# Altium PCB Cap_Sensor_8x8.PcbDoc
Units mil, origin at the board's own origin, x right, y up, seen from the top; angles counter-clockwise.
Board outline 3175 x 3000 mil, 2 copper layers (Top Layer, Bottom Layer); 74 components, 83 nets, 388 pads, 67 vias.
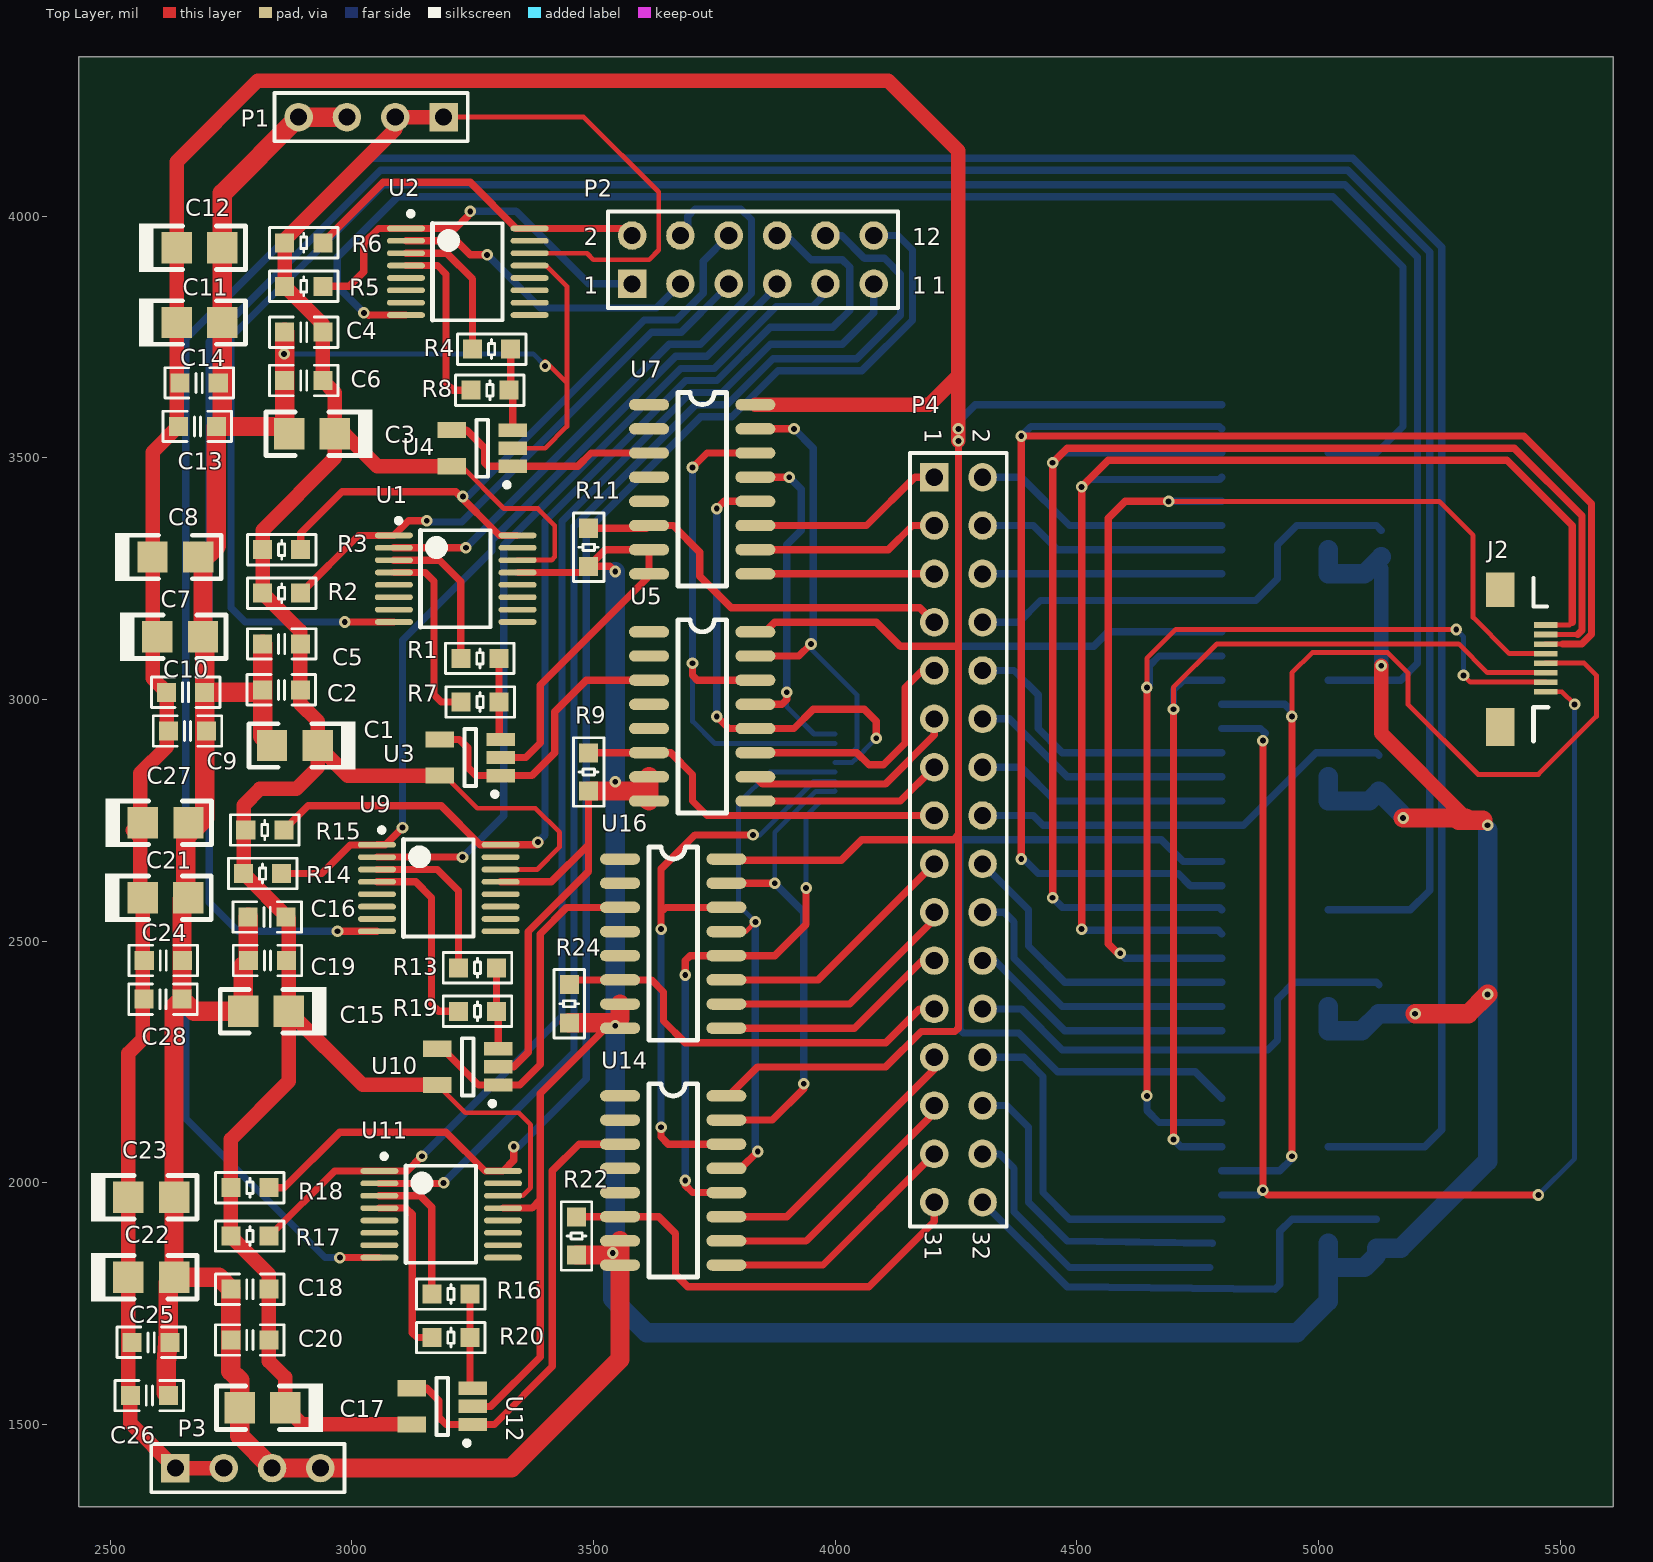
[diagram p0: Top Layer view]
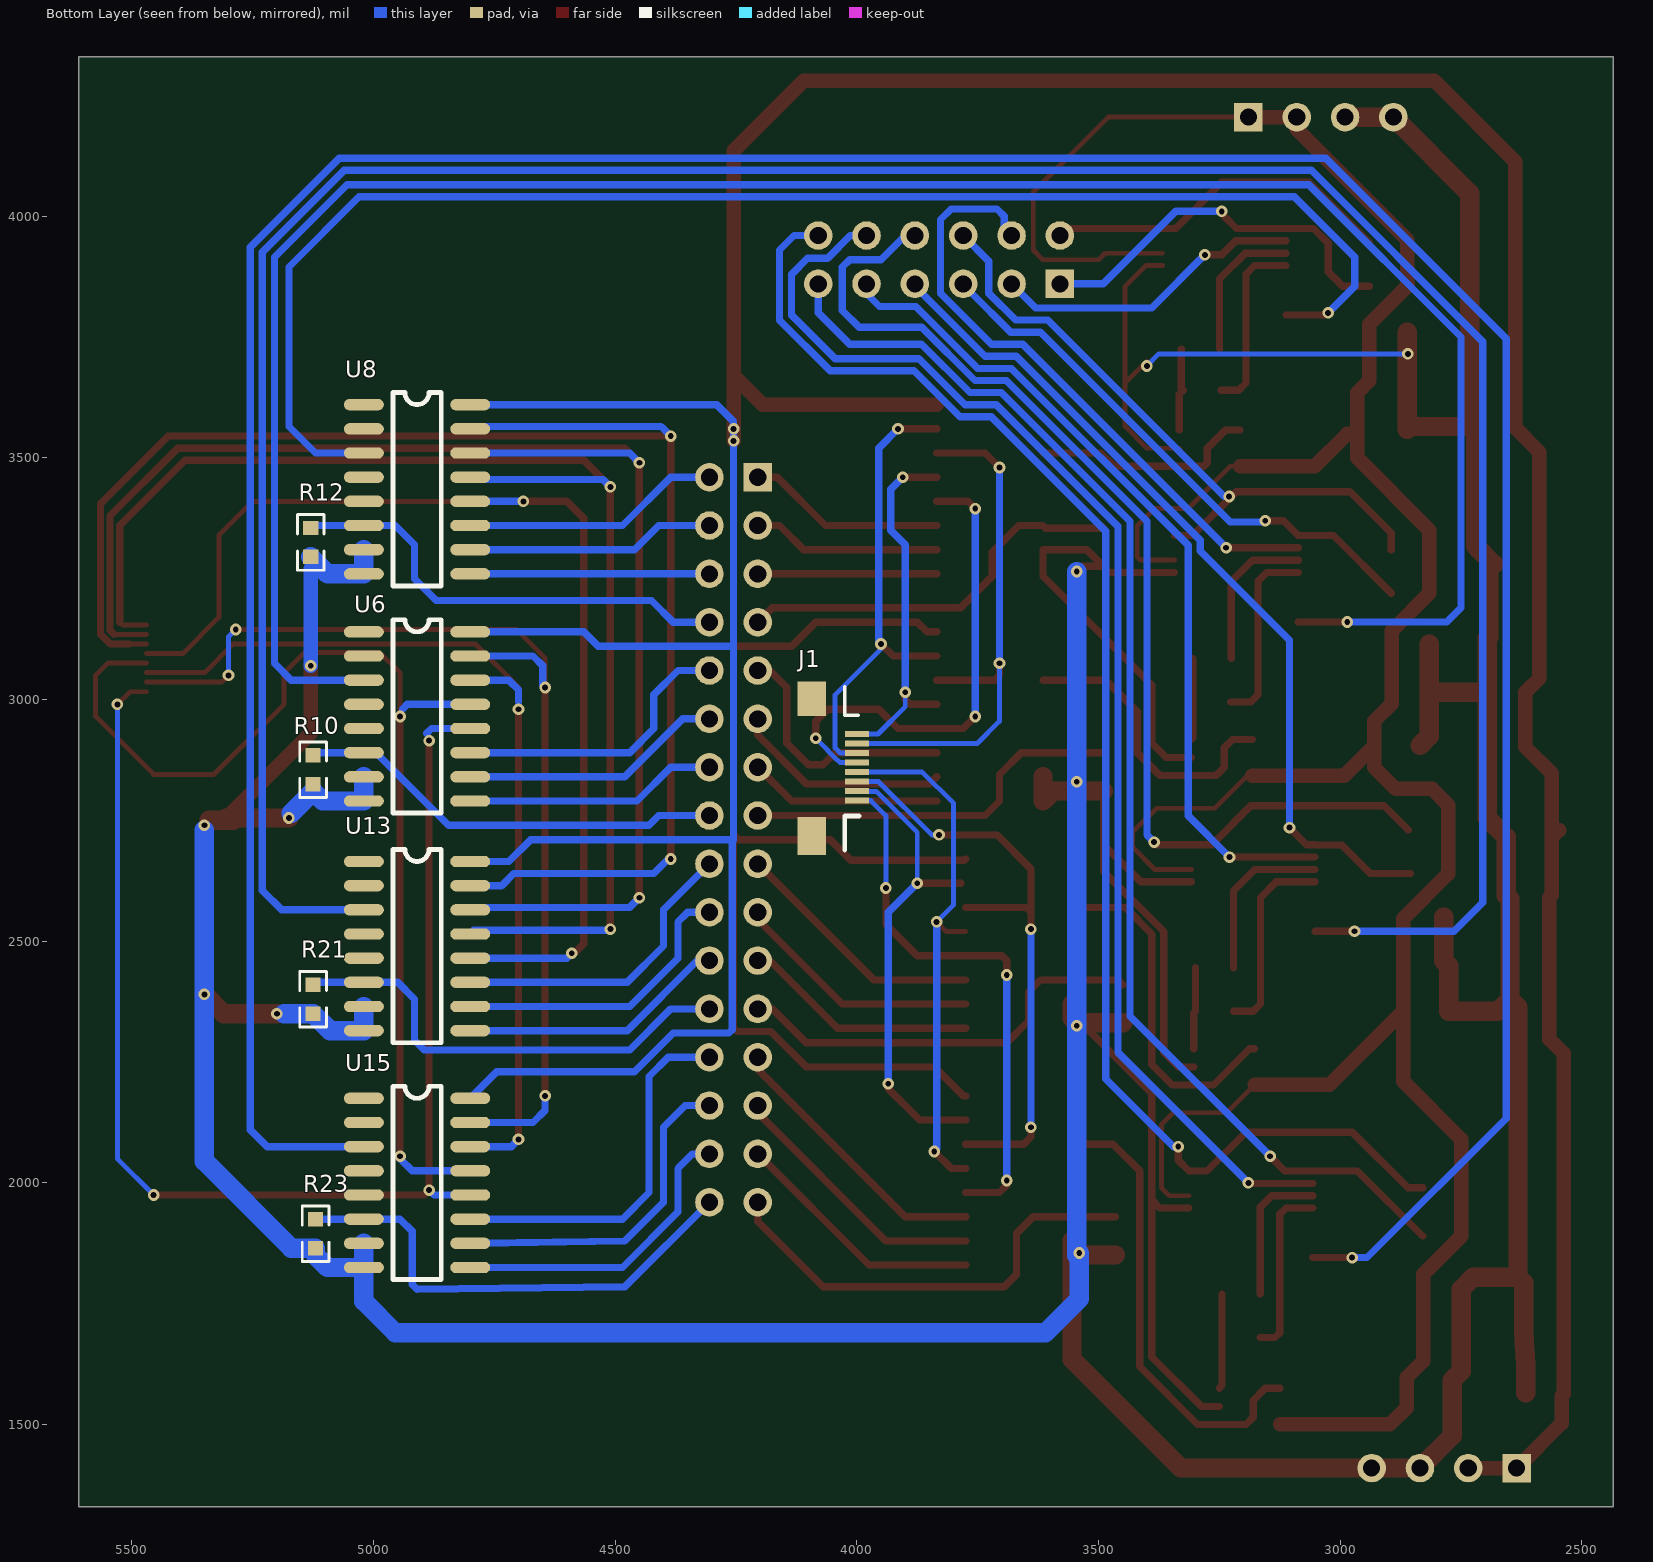
[diagram p1: Bottom Layer view, seen from below]
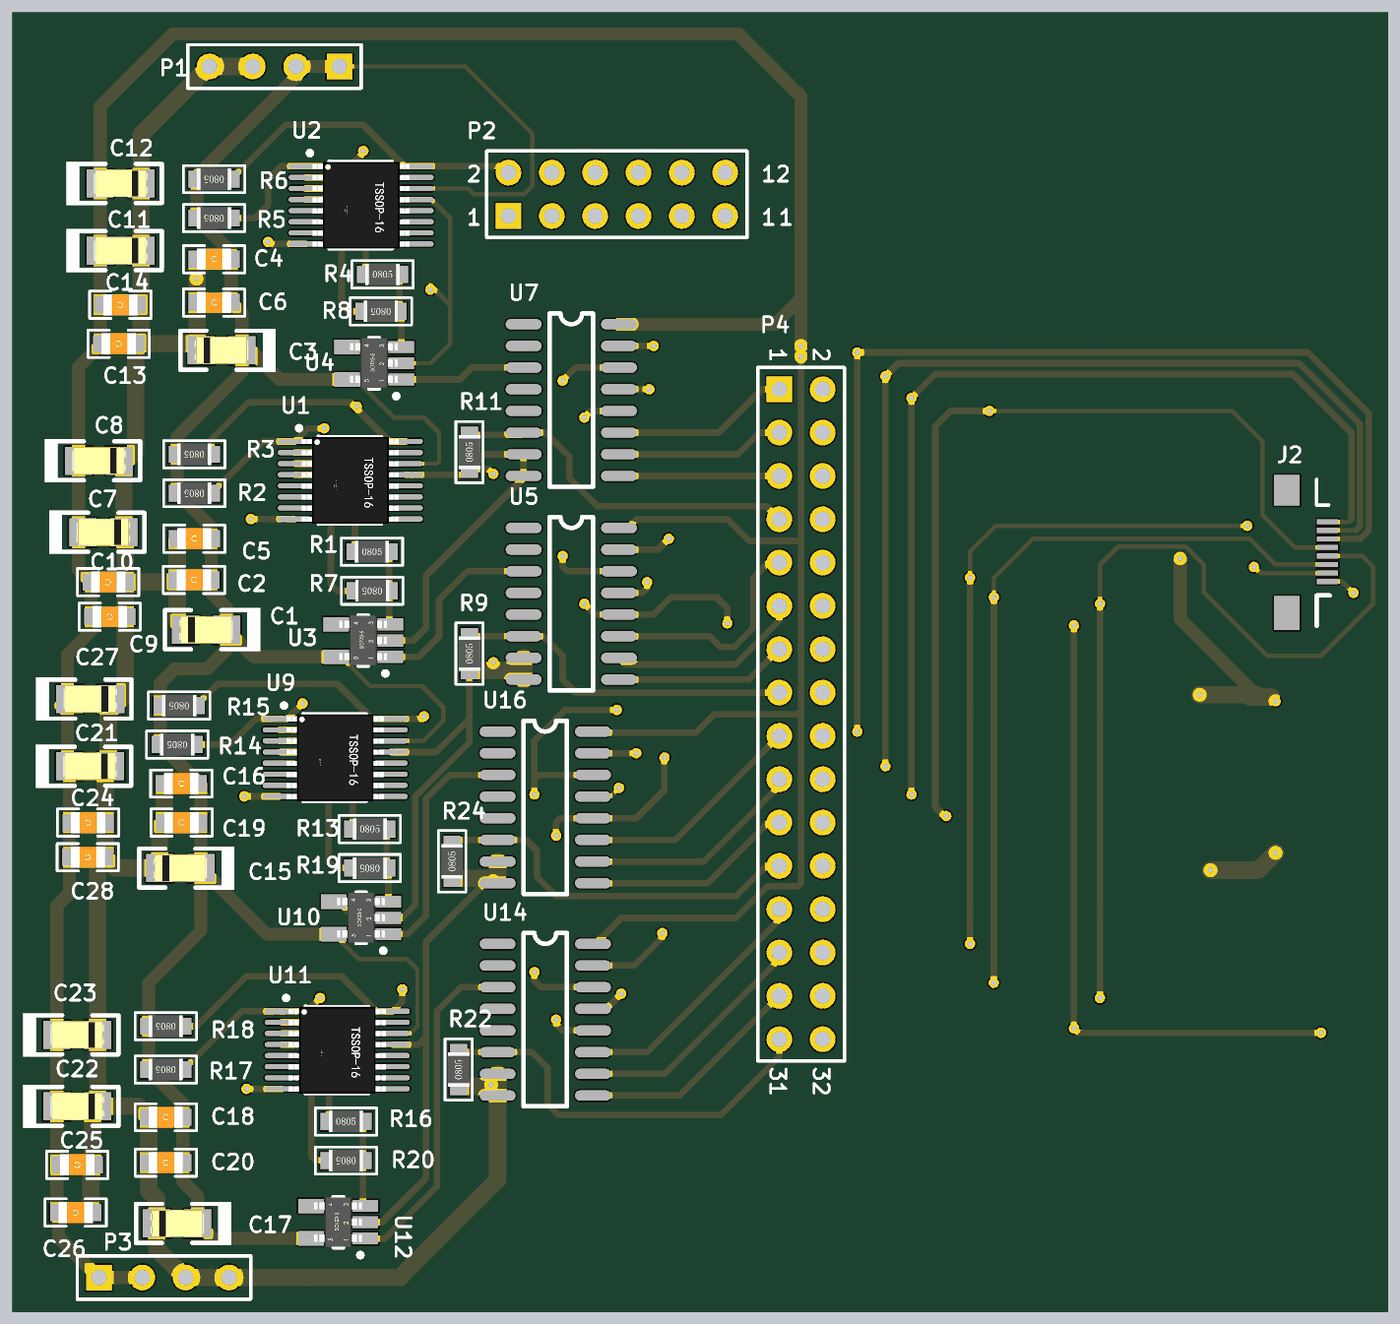
[diagram p2: 3D render of the assembled board from above, using the file's embedded part models]

## Layer stack, top to bottom
Top Solder: solder mask 0.4, Solder Resist, Dk 3.5
Top Layer: signal copper 1.4
Dielectric 1: dielectric 12.6, FR-4, Dk 4.8
Bottom Layer: signal copper 1.4
Bottom Solder: solder mask 0.4, Solder Resist, Dk 3.5

## Board outline
2435,1330 2435,4330 5610,4330 5610,1330

## Design rules (kind name [scope] priority, off if disabled: settings)
Clearance [All] p1: gap=10 ignorepadtopadclearanceinfootprint=TRUE except(0: Arc-Hole Track-Hole SMDPad-Hole THPad-Hole Via-Hole Fill-Hole Poly-Hole Region-Hole Text-Hole; 5: Arc-Arc Arc-Track Arc-SMDPad Track-Track Track-SMDPad SMDPad-SMDPad)
PolygonConnect [All] p1: connectstyle=Relief reliefconductorwidth=10 reliefentries=4 polygonreliefangle="90 Angle" airgapwidth=10
RoutingVias [All] p1: holewidth=28 width=50 viastyle="Through Hole" minholewidth=28 minwidth=50 maxholewidth=28 maxwidth=50
SolderMaskExpansion [All] p1: expansion=4
Width [All] p1: maxlimit=50 minlimit=10 preferedwidth=15
30 further rules are at their usual default settings.

## Components (designator, comment, footprint, x,y, rotation, side; value= is the part's Value field where it differs from the comment)
C1 "Cap Pol2" Cap-TA 2882.24,2905 r0 top value=10uF
C2 "Cap" 0805C 2854.37,3020 r0 top value=100nF
C3 "Cap Pol2" Cap-TA 2917.76,3550 r0 top value=10uF
C4 "Cap" 0805C 2900.63,3760 r0 top value=100nF
C5 "Cap" 0805C 2855,3115 r0 top value=100nF
C6 "Cap" 0805C 2900.63,3660 r0 top value=100nF
C7 "Cap Pol2" Cap-TA 2645,3130 r180 top value=10uF
C8 "Cap Pol2" Cap-TA 2635,3295 r180 top value=10uF
C9 "Cap" 0805C 2660,2935 r180 top value=100nF
C10 "Cap" 0805C 2656.18,3015 r180 top value=100nF
C11 "Cap Pol2" Cap-TA 2685,3780 r180 top value=10uF
C12 "Cap Pol2" Cap-TA 2685,3935 r180 top value=10uF
C13 "Cap" 0805C 2680.55,3565 r180 top value=100nF
C14 "Cap" 0805C 2684.37,3655 r180 top value=100nF
C15 "Cap Pol2" Cap-TA 2822.76,2355 r0 top value=10uF
C16 "Cap" 0805C 2825,2550 r0 top value=100nF
C17 "Cap Pol2" Cap-TA 2815.34,1535 r0 top value=10uF
C18 "Cap" 0805C 2789.16,1780 r0 top value=100nF
C19 "Cap" 0805C 2825.63,2460 r0 top value=100nF
C20 "Cap" 0805C 2789.16,1675 r0 top value=100nF
C21 "Cap Pol2" Cap-TA 2614.37,2590 r180 top value=10uF
C22 "Cap Pol2" Cap-TA 2585.01,1805 r180 top value=10uF
C23 "Cap Pol2" Cap-TA 2585.01,1970 r180 top value=10uF
C24 "Cap" 0805C 2610,2460 r180 top value=100nF
C25 "Cap" 0805C 2585,1670 r180 top value=100nF
C26 "Cap" 0805C 2581.19,1560 r180 top value=100nF
C27 "Cap Pol2" Cap-TA 2615,2745 r180 top value=10uF
C28 "Cap" 0805C 2609.37,2380 r180 top value=100nF
J1 "FPC_8P" FPC8-0.5 4000,2928.74 r270 bottom
J2 "FPC_8P" FPC8-0.5 5470,3154.06 r270 top
P1 "Header 4" HDR1X4 3190,4205 r180 top
P2 "Header 6X2" HDR2X6 3580,3860 r0 top
P3 "Header 4" HDR1X4 2635,1410 r0 top
P4 "Header 16X2" HDR2X16 4205,3460 r270 top
R1 "Res" 0805R 3265,3085 r0 top value=100k
R2 "Res" 0805R 2855,3220 r180 top value=3k3
R3 "Res" 0805R 2855,3310 r180 top value=3k3
R4 "Res" 0805R 3289.37,3725 r0 top value=100k
R5 "Res" 0805R 2900.63,3855 r180 top value=3k3
R6 "Res" 0805R 2900.63,3945 r180 top value=3k3
R7 "Res" 0805R 3265.63,2995 r180 top value=118k
R8 "Res" 0805R 3285.63,3640 r180 top value=118k
R9 "Res" 0805R 3490,2850 r90 top value=0R
R10 "Res" 0603R 5125,2855 r90 bottom value=0R
R11 "Res" 0805R 3490,3315 r90 top value=0R
R12 "Res" 0603R 5130,3325 r90 bottom value=0R
R13 "Res" 0805R 3260,2445 r0 top value=100k
R14 "Res" 0805R 2815.63,2640 r180 top value=3k3
R15 "Res" 0805R 2820,2730 r180 top value=3k3
R16 "Res" 0805R 3205,1770 r0 top value=100k
R17 "Res" 0805R 2789.16,1890 r180 top value=3k3
R18 "Res" 0805R 2789.16,1990 r180 top value=3k3
R19 "Res" 0805R 3260,2355 r180 top value=118k
R20 "Res" 0805R 3205,1680 r180 top value=118k
R21 "Res" 0603R 5125,2380 r90 bottom value=0R
R22 "Res" 0805R 3465,1890 r90 top value=0R
R23 "Res" 0603R 5120,1895 r90 bottom value=0R
R24 "Res" 0805R 3450,2370.63 r90 top value=0R
U1 "AD7746" TSSOP16 3215,3250 r0 top
U2 "AD7746" TSSOP16 3240,3885 r0 top
U3 "AD8515" sot23-5 3245,2880 r180 top
U4 "AD8515" sot23-5 3270,3520 r180 top
U5 "CD4051" SO16 3775,3165 r0 top
U6 "CD4051" SO16 4860,3165 r180 bottom
U7 "CD4051" SO16 3775,3635 r0 top
U8 "CD4051" SO16 4860,3635 r180 bottom
U9 "AD7746" TSSOP16 3180,2610 r0 top
U10 "AD8515" sot23-5 3240,2240 r180 top
U11 "AD7746" TSSOP16 3185,1935 r0 top
U12 "AD8515" sot23-5 3187.2,1537.6 r180 top
U13 "CD4051" SO16 4860,2690 r180 bottom
U14 "CD4051" SO16 3715,2205 r0 top
U15 "CD4051" SO16 4860,2200 r180 bottom
U16 "CD4051" SO16 3715,2695 r0 top

## Footprints (in the part's own frame and the unit in brackets; to place one, negate y for a bottom-side part, rotate by r counter-clockwise, add the part's x,y. Pads: shape width x height; smd on the part's side, far side on the other; paste and mask are expansions set on the pad)
0603R [mm]
  rect 0.76x0.8 smd: 1(-0.76,0) 2(0.76,0)
  silkscreen extent -1.46,-0.7 1.46,0.7, body extent -1,-0.39 1,0.39, height 0.79
0805C [mm]
  rect 1x1 smd: 1(-1,0) 2(1,0)
  silkscreen extent -1.8,-0.8 1.8,0.8, body extent -1.01,-0.62 1,0.63, height 0.92
0805R [mm]
  rect 1x1 smd: 1(-1,0) 2(1,0)
  silkscreen extent -1.8,-0.8 1.8,0.8, body extent -1,-0.63 1,0.63, height 0.55
Cap-TA [mm]
  rect 1.6x1.65 smd: 1(1.2,0) 2(-1.2,0)
  silkscreen extent -2.41,-1.27 3.17,1.27, body extent -1.6,-0.8 1.6,0.8, height 1.61
FPC8-0.5 [mm]
  rect 0.3x1.25 smd: 1(0,0) 2(0.5,0) 3(1,0) 4(1.5,0) 5(2,0) 6(2.5,0) 7(3,0) 8(3.5,0)
  rect 1.8x1.5 smd: 9(-1.85,-2.375)
  rect 2x1.5 smd: 10(5.35,-2.375)
  silkscreen extent -2.48,-0.64 6.1,0.13
HDR1X4 [mm] "Connector; Header; 4 Position"
  rect 1.5x1.5 hole 0.9: 1(0,0)
  round 1.5 hole 0.9: 2(2.54,0) 3(5.08,0) 4(7.62,0)
  silkscreen extent -1.27,-1.27 8.89,1.27
HDR2X6 [mm] "Connector; Header; 6x2 Position"
  rect 1.5x1.5 hole 0.9: 1(0,0)
  round 1.5 hole 0.9: 2(0,2.54) 3(2.54,0) 4(2.54,2.54) 5(5.08,0) 6(5.08,2.54) 7(7.62,0) 8(7.62,2.54) 9(10.16,0) 10(10.16,2.54) 11(12.7,0) 12(12.7,2.54)
  silkscreen extent -1.27,-1.27 13.97,3.81
HDR2X16 [mm] "Connector; Header; 16x2 Position"
  rect 1.5x1.5 hole 0.9: 1(0,0)
  round 1.5 hole 0.9: 2(0,2.54) 3(2.54,0) 4(2.54,2.54) 5(5.08,0) 6(5.08,2.54) 7(7.62,0) 8(7.62,2.54) 9(10.16,0) 10(10.16,2.54) 11(12.7,0) 12(12.7,2.54) 13(15.24,0) 14(15.24,2.54) 15(17.78,0) 16(17.78,2.54) 17(20.32,0) 18(20.32,2.54) 19(22.86,0) 20(22.86,2.54) 21(25.4,0) 22(25.4,2.54) 23(27.94,0) 24(27.94,2.54) 25(30.48,0) 26(30.48,2.54) 27(33.02,0) 28(33.02,2.54) 29(35.56,0) 30(35.56,2.54) 31(38.1,0) 32(38.1,2.54)
  silkscreen extent -1.27,-1.27 39.37,3.81
SO16 [mm]
  oval 2.1x0.6 smd: 1(-4.064,-0.635) 2(-4.064,-1.905) 3(-4.064,-3.175) 4(-4.064,-4.445) 5(-4.064,-5.715) 6(-4.064,-6.985) 7(-4.064,-8.255) 8(-4.064,-9.525) 9(1.524,-9.525) 10(1.524,-8.255) 11(1.524,-6.985) 12(1.524,-5.715) 13(1.524,-4.445) 14(1.524,-3.175) 15(1.524,-1.905) 16(1.524,-0.635)
  silkscreen extent -2.54,-10.16 0,0
sot23-5 [mm]
  rect 1.5x0.7 smd: 1(-1.595,0.95) 2(-1.595,0) 3(-1.595,-0.95)
  rect 1.5x0.85 smd: 4(1.595,-0.95) 5(1.595,0.95)
  silkscreen extent -1.42,-1.5 0.3,2.05, body extent -1.39,-1.46 1.41,1.44, height 1.09
TSSOP16 [mm]
  oval 2x0.3 smd: 1(-3.25,2.275) 2(-3.25,1.625) 3(-3.25,0.975) 4(-3.25,0.325) 5(-3.25,-0.325) 6(-3.25,-0.975) 7(-3.25,-1.625) 8(-3.25,-2.275) 9(3.25,-2.275) 10(3.25,-1.625) 11(3.25,-0.975) 12(3.25,-0.325) 13(3.25,0.325) 14(3.25,0.975) 15(3.25,1.625) 16(3.25,2.275)
  silkscreen extent -3.12,-2.55 1.83,3.17, body extent -2.85,-2.56 2.85,2.54, height 1.45

## Part data
C1 C3 C7 C8 C11 C12 C15 C17 C21 C22 C23 C27: "Polarized Capacitor (Axial)", LatestRevisionDate=17-Jul-2002, LatestRevisionNote="Re-released for DXP Platform.", PackageDescription="Polarized Capacitor; 2 Leads", PackageReference=POLAR0.8, Published=8-Jun-2000, Publisher="Altium Limited"
C2 C4 C5 C6 C9 C10 C13 C14 C16 C18 C19 C20 C24 C25 C26 C28: "Capacitor", LatestRevisionDate=17-Jul-2002, LatestRevisionNote="Re-released for DXP Platform.", PackageDescription="Radial Cap, Thru-Hole; 2 Leads; 0.3 in Pin Spacing", PackageReference=RAD-0.3, Published=8-Jun-2000, Publisher="Altium Limited"
P1 P3: "Header, 4-Pin", LatestRevisionDate=17-Jul-2002, LatestRevisionNote="Re-released for DXP Platform.", Publisher="Altium Limited"
P2: "Header, 6-Pin, Dual row", LatestRevisionDate=17-Jul-2002, LatestRevisionNote="Re-released for DXP Platform.", Publisher="Altium Limited"
P4: "Header, 16-Pin, Dual row", LatestRevisionDate=17-Jul-2002, LatestRevisionNote="Re-released for DXP Platform.", Publisher="Altium Limited"
R1 R2 R3 R4 R5 R6 R7 R8 R9 R10 R11 R12 R13 R14 R15 R16 R17 R18 R19 R20 R21 R22 R23 R24: "Resistor", LatestRevisionDate=17-Jul-2002, LatestRevisionNote="Re-released for DXP Platform.", PackageDescription="Axial Device, Thru-Hole; 2 Leads; 0.4 in Pin Spacing", PackageReference=AXIAL-0.4, Published=8-Jun-2000, Publisher="Altium Limited"

## Via types
v1: diameter 24, hole 12, Top Layer to Bottom Layer, 67 vias

## Nets (pads, with @x,y where several pads share a name; then routed paths per layer and width w, separated by ;. In a path a pad name is that pad's centre, name@x,y a point inside that pad or via, vN(x,y) a via of type N, cw(c..) or ccw(c..) an arc to the next point about the centre after c; other vN are vias at no path point)
GND: C1.2 C2.1 C3.2 C4.1 C5.1 C6.1 C7.2 C8.2 C9.1 C10.1 C11.2 C12.2 C13.1 C14.1 C15.2 C16.1 C17.2 C18.1 C19.1 C20.1 C21.2 C22.2 C23.2 C24.1 C25.1 C26.1 C27.2 C28.1 P1.3 P1.4 P3.3 P3.4 R9.1 R10.1 R11.1 R12.1 R21.1 R22.1 R23.1 R24.1 U1.13 U2.13 U3.2 U4.2 U5.7 U5.8 U6.7 U6.8 U7.7 U7.8 U8.7 U8.8 U9.13 U10.2 U11.13 U12.2 U13.7 U13.8 U14.7 U14.8 U15.7 U15.8 U16.7 U16.8 | length 15683.3
  Top Layer w10: U4.2 3400,3520 3445,3565 3445,3655 ; U2.13 3402.2,3897.8 3445,3855 3445,3655 ; v1(3400,3690) 3400,3700 3445,3655
  Top Layer w15: U12.2 3287.6,1537.6 3390,1640 3390,1965 ; U10.2 3335,2240 3365,2270 3365,2520 3490,2645 3490,2700 ; U3.2 3360,2880 3390,2910 3390,3030 3615,3255 U7.8 U7.7 3524.37,3310 R11.1 ; U9.13 3412.8,2622.8 3490,2700 ; U11.13 3372.8,1947.8 3390,1965 ; U1.13 3477.17,3262.8 R11.1 ; R9.1 3490,2700 ; U16.8@3536.26,2331.26 3390,2185 3390,1965 ; v1(3545,3265) 3534.37,3275.63 R11.1
  Top Layer w30: v1(5130,3070) 5130,2930 5305,2755 5290,2750
  Top Layer w40: C26.1@2616.12,1565.56 2616.12,1625 2619.22,1670.35 2619.56,1675.33 2620.56,1690 2620.56,1793.31 C22.2 ; C16.1 2785.63,2460.63 C19.1 2775.51,2449.25 C15.2 2673.74,2355 C28.1 ; C2.1 2810,3015 C10.1 ; C5.1 2815.63,2924.37 C1.2 ; C4.1 C6.1 2861.26,3559.25 2855.51,3565 C13.1 ; P1.3 P1.4 2732.24,4047.24 C12.2 C11.2 2732.24,3577.32 C13.1 ; R24.1 U16.8@3536.26,2331.26 ; R22.1 v1@3534.37,1850.63 ; R9.1 3594.37,2810.63 U5.8 U5.7 ; U14.7 U14.8 3555,1635 3330,1410 P3.4 P3.3 2768.09,1476.91 C17.2 2768.09,1591.91 2749.79,1610.21 C20.1 C18.1 2724.79,1805 C22.2 ; 3555,2340 U16.7 ; v1(5175,2755) 5305,2755 ; v1(5200,2350) 5310,2350 v1(5350,2390) ; 5290,2750 5340,2750 ; C22.2 C23.2 2632.25,2363.51 C28.1 ; C28.1 2648.74,2587.13 2656.61,2595 2656.61,2715 2695.55,2753.94 C10.1 ; C10.1 2695.55,3126.69 C7.2 2692.24,3270 2682.24,3280 2719.92,3317.68 C13.1
  Bottom Layer w10: v1(2860,3715) 3375,3715 v1(3400,3690)
  Bottom Layer w30: v1(5130,3070) 5130,3270.08
  Bottom Layer w40: v1(3540,1855) 3540,1760 3610,1690 4955,1690 5020,1755 U15.8 ; v1@3545,1850 v1(3545,2325) v1(3545,2830) v1(3545,3265) ; U15.7 U15.8 ; U13.7 U13.8 5089.92,2315 R21.1 5184.92,2350.08 ; U6.7 U6.8 5105,2790 5125,2810 v1@5170,2765 ; U8.7 U8.8 5094.92,3260 R12.1 ; v1@5350,2730 v1(5350,2390) 5350,2045 5170.08,1865.08 R23.1 5120,1850 5095,1825 U15.8
  other v1: 5350,2740
NetR1_1: R1.1 U1.3 | length 316.2
  Top Layer w15: U1.3 3181.61,3288.39 3225.63,3244.37 R1.1
NetR1_2: R1.2 R7.1 U3.3 | length 169
  Top Layer w15: R1.2 3304.37,2995.63 R7.1 3305,2920.2 U3.3
NetR4_1: R4.1 U2.3 | length 305.1
  Top Layer w15: U2.3 3196.61,3923.39 3250,3870 R4.1
NetR4_2: R4.2 R8.1 U4.3 | length 172.4
  Top Layer w15: R4.2 3328.74,3643.74 R8.1 3332.8,3632.2 U4.3
NetR7_2: R7.2 U1.4 | length 387.8
  Top Layer w15: U1.4 3152.2,3262.8 3170,3245 3170,3010 3185,2995 R7.2
NetR8_2: R8.2 U2.4 | length 372.8
  Top Layer w15: U2.4 3177.2,3897.8 3195,3880 3195,3655 3210,3640 R8.2
NetR13_1: R13.1 U9.3 | length 346.2
  Top Layer w15: U9.3 3176.61,2648.39 3220.63,2604.37 R13.1
NetR13_2: R13.2 R19.1 U10.3 | length 169
  Top Layer w15: R13.2 R19.1 3302.79,2351.58 U10.3
NetR16_1: R16.1 U11.3 | length 297.9
  Top Layer w15: U11.3 3141.61,1973.39 3165.63,1949.37 R16.1
NetR16_2: R16.2 R20.1 U12.3 | length 197.3
  Top Layer w15: R16.2 R20.1 3244.37,1580.63 U12.3
NetR19_2: R19.2 U9.4 | length 408.4
  Top Layer w15: U9.4 3132.2,2622.8 3165,2590 3165,2370 3180,2355 R19.2
NetR20_2: R20.2 U11.4 | length 363
  Top Layer w15: U11.4 3112.2,1947.8 3125,1935 3125,1690 3135,1680 R20.2
RDY1: P2.3 U2.2 | length 646.2
  Top Layer w15: U2.2 3216.02,3948.98 3245,3920 v1(3280,3920)
  Bottom Layer w15: v1(3280,3920) 3390,3810 3630,3810 P2.3
RDY2: P2.4 U1.2 | length 1304.1
  Top Layer w15: U1.2 v1(3236.02,3313.98)
  Bottom Layer w15: v1(3236.02,3313.98) 3657.05,3735 3721.51,3735 3827.03,3840.52 3827.03,3992.97 3805,4015 3710,4015 3695,4000 3695,3975 P2.4
RDY3: P2.9 U9.2 | length 1758.8
  Top Layer w15: U9.2 v1(3228.98,2673.98)
  Bottom Layer w15: v1(3228.98,2673.98) 3314.55,2759.55 3314.55,3319.19 3680.36,3685 3750,3685 3877.97,3812.97 3952.97,3812.97 3980,3840 P2.9
RDY4: P2.10 U11.2 | length 2732.7
  Top Layer w15: U11.2 3188.98,1998.98 v1(3190,2000)
  Bottom Layer w15: v1(3190,2000) 3460,2270 3460,3358.58 3711.42,3610 3776.42,3610 3871.42,3705 4045,3705 4135,3795 4135,3880 4102.03,3912.97 4060.52,3912.97 4013.49,3960 P2.10
SCL1: P2.1 R5.1 U2.1 | length 791.8
  Top Layer w15: R5.1 2995,3855 3025,3885 3025,3944.14 3055.43,3974.57 U2.1 3214.57,3974.57 v1@3240,4000
  Bottom Layer w15: v1(3245,4010) 3340,4010 3490,3860 P2.1
SCL2: P2.5 R2.1 U1.1 | length 1162.7
  Top Layer w15: R2.1 3013.94,3339.57 U1.1 3117.48,3370 v1(3155,3370)
  Bottom Layer w15: v1(3155,3370) 3157.5,3367.5 3227.6,3367.5 3262.5,3402.4 3262.5,3402.5 3620,3760 3681.86,3760 3765,3843.14 3765,3860 P2.5
SCL3: P2.7 R14.1 U9.1 | length 1779.3
  Top Layer w15: R14.1 2937.8,2640 2996.77,2698.98 3051.46,2698.98 U9.1 3069.57,2699.57 v1(3105,2735)
  Bottom Layer w15: v1(3105,2735) 3105,3122.85 3289.55,3307.4 3289.55,3329.55 3670,3710 3735,3710 3870,3845 3870,3860 P2.7
SCL4: P2.11 R17.1 U11.1 | length 2702.4
  Top Layer w15: R17.1 2830,1890 2964.57,2024.57 U11.1 3114.57,2024.57 v1(3145,2055)
  Bottom Layer w15: v1(3145,2055) 3435,2345 3435,3368.93 3701.07,3635 3766.07,3635 3866.07,3735 4015,3735 4080,3800 P2.11
SDA1: P2.2 R6.1 U2.16 | length 737.3
  Top Layer w15: R6.1 3065,4070 3245,4070 3340.43,3974.57 U2.16 3565.43,3974.57 P2.2
SDA2: P2.6 R3.1 U1.16 | length 1368.5
  Top Layer w15: R3.1 2894.37,3344.37 2980,3430 3215,3430 3305.43,3339.57 U1.16
  Bottom Layer w15: v1(3230,3420) 3240,3420 3605,3785 3671.51,3785 3727.03,3840.52 3727.03,3907.03 P2.6
SDA3: P2.8 R15.1 U9.16 | length 2338.1
  Top Layer w15: R15.1 2909.37,2780 3185,2780 3265.43,2699.57 U9.16 3383.7,2699.57 3389.14,2705 v1(3385,2705)
  Bottom Layer w15: v1(3385,2705) 3400,2720 3400,3369.29 3690.71,3660 3755.71,3660 3865.71,3770 3995,3770 4030,3805 4030,3895 4015,3910 3950,3910 3900,3960 P2.8
SDA4: P2.12 R18.1 U11.16 | length 3059.7
  Top Layer w15: R18.1 2860,1990 2975,2105 3195,2105 3275.43,2024.57 U11.16 3335,2046.62 v1(3335,2075)
  Bottom Layer w15: v1(3335,2075) 3345,2075 3485,2215 3485,3348.22 3721.78,3585 3786.78,3585 3881.78,3680 4055.36,3680 4160,3784.64 4160,3930 4130,3960 P2.12
Switch1_Down: U2.8 U8.3 | length 3039.6
  Top Layer w15: v1@3035,3795 3035.43,3795.43 U2.8
  Bottom Layer w15: v1(3025,3800) 2970,3855 2970,3915 3095,4040 5030,4040 5175,3895 5175,3565 5120,3510 U8.3
Switch1_Down_A: P4.2 U8.11 | length 536.4
  Bottom Layer w15: P4.2 4385,3460 4485,3360 U8.11
Switch1_Down_B: P4.4 U8.10 | length 515.7
  Bottom Layer w15: P4.4 4410,3360 4460,3310 U8.10
Switch1_Down_C: P4.6 U8.9 | length 502.1
  Bottom Layer w15: P4.6@4310,3265 P4.6 U8.9
Switch1_Down_INH: P4.8 R12.2 U8.6 | length 953
  Bottom Layer w15: P4.8 4380,3160 4425,3205 4870,3205 4915,3250 4915,3320 4955,3360 U8.6 5119.92,3360 R12.2@5130,3349.92
Switch1_Up: U4.1 U4.4 U7.3 | length 467.7
  Top Layer w15: U4.4 3237.6,3557.4 3275,3520 3275,3490 3282.4,3482.6 U4.1 3467.6,3482.6 3495,3510 U7.3
Switch1_Up_A: P4.1 U7.11 | length 411.4
  Top Layer w15: U7.11 4065,3360 4165,3460 P4.1
Switch1_Up_B: P4.3 U7.10 | length 390.7
  Top Layer w15: U7.10 4110,3310 4160,3360 P4.3
Switch1_Up_C: P4.5 U7.9 | length 370
  Top Layer w15: U7.9 P4.5
Switch1_Up_INH: P4.7 R11.2 U7.6 | length 837.4
  Top Layer w15: R11.2@3495.63,3360 R11.2 3609.37,3354.37 U7.6 3665,3360 3720,3305 3720,3255 3785,3190 4175,3190 P4.7
Switch2_Down: U1.8 U6.3 | length 4596.4
  Top Layer w15: v1(2985.43,3160.43) U1.8
  Bottom Layer w15: v1(2985.43,3160.43) 2779.57,3160.43 2750,3190 2750,3750 3065,4065 5055,4065 5205,3915 5205,3075 5170,3040 U6.3
Switch2_Down_A: P4.10 U6.11 | length 606.4
  Bottom Layer w15: P4.10 4370,3060 4420,3010 4420,2940 4470,2890 U6.11
Switch2_Down_B: P4.12 U6.10 | length 544.7
  Bottom Layer w15: P4.12 4360,2960 4480,2840 U6.10
Switch2_Down_C: P4.14 U6.9 | length 524
  Bottom Layer w15: P4.14 4385,2860 4455,2790 U6.9
Switch2_Down_INH: P4.16 R10.2 U6.6 | length 913.7
  Bottom Layer w15: P4.16@4320,2745 P4.16 4410,2760 4430,2740 4845,2740 4995,2890 U6.6 5119.92,2890 R10.2
Switch2_Up: U3.1 U3.4 U5.3 | length 618.8
  Top Layer w15: U3.4 3222.6,2917.4 3240,2900 3240,2860 3257.4,2842.6 U3.1 3372.6,2842.6 3420,2890 3420,2975 3485,3040 U5.3
Switch2_Up_A: P4.9 U5.11 | length 528.5
  Top Layer w15: U5.11 4045,2890 4070,2865 4100,2865 4145,2910 4145,3025 4180,3060 P4.9
Switch2_Up_B: P4.11 U5.10 | length 451.8
  Top Layer w15: U5.10 3850,2825 4103.49,2825 4205,2926.51 P4.11
Switch2_Up_C: P4.13 U5.9 | length 399
  Top Layer w15: U5.9 4135,2790 P4.13
Switch2_Up_INH: P4.15 R9.2 U5.6 | length 801.3
  Top Layer w15: R9.2 3490.63,2890 U5.6 3660,2890 3705,2845 3705,2790 3735,2760 P4.15
Switch3_Down: U9.8 U13.3 | length 5821.2
  Top Layer w15: v1(2970.43,2520.43) U9.8
  Bottom Layer w15: v1(2970.43,2520.43) 2764.57,2520.43 2705,2580 2705,3740.36 3059.64,4095 5060.36,4095 5230,3925.36 5230,2605 5190,2565 U13.3
Switch3_Down_A: P4.18 U13.11 | length 640.4
  Bottom Layer w15: P4.18 4400,2565 4400,2490 4475,2415 U13.11
Switch3_Down_B: P4.20 U13.10 | length 619.7
  Bottom Layer w15: P4.20 4350,2560 4370,2540 4370,2465 4470,2365 U13.10
Switch3_Down_C: P4.22 U13.9 | length 555.1
  Bottom Layer w15: P4.22 4330,2460 4475,2315 U13.9
Switch3_Down_INH: P4.24 R21.2 U13.6 | length 965.1
  Bottom Layer w15: P4.24 4385,2360 4470,2275 4895,2275 4915,2295 4915,2380 4950,2415 U13.6 5119.92,2415 R21.2
Switch3_Up: U10.1 U10.4 U16.3 | length 719.1
  Top Layer w15: U10.4 3187.6,2277.4 3262.4,2202.6 U10.1 3347.6,2202.6 3390,2245 3390,2515 3445,2570 U16.3
Switch3_Up_A: P4.17 U16.11 | length 529.4
  Top Layer w15: U16.11 3965,2420 P4.17
Switch3_Up_B: P4.19 U16.10 | length 517.5
  Top Layer w15: U16.10 4030,2370 4205,2545 P4.19
Switch3_Up_C: P4.21 U16.9 | length 488
  Top Layer w15: U16.9 4040,2320 4180,2460 P4.21
Switch3_Up_INH: P4.23 R24.2 U16.6 | length 877.1
  Top Layer w15: R24.2 3460,2420 U16.6 3620,2420 3645,2395 3645,2335 3690,2290 4105,2290 4175,2360 P4.23
Switch4_Down: U11.8 U15.3 | length 7037.5
  Top Layer w15: v1(2975.43,1845.43) U11.8
  Bottom Layer w15: v1(2975.43,1845.43) 2944.57,1845.43 2656.61,2133.39 2656.61,3746.61 3030,4120 5070.71,4120 5255,3935.71 5255,2110 5220,2075 U15.3
Switch4_Down_A: P4.26 U15.11 | length 774.4
  Bottom Layer w15: P4.26 4390,2260 4430,2220 4430,1980 4485,1925 U15.11
Switch4_Down_B: P4.28 U15.10 | length 681.8
  Bottom Layer w15: P4.28 4355,2160 4400,2115 4400,1960 4480,1880 U15.10@4780,1875
Switch4_Down_C: P4.30 U15.9 | length 620.1
  Bottom Layer w15: P4.30 4340,2060 4370,2030 4370,1940 4485,1825 U15.9@4775,1825
Switch4_Down_INH: P4.32 R23.2 U15.6 | length 1012
  Bottom Layer w15: P4.32 4480,1785 4910,1780 4920,1790 4920,1900 4945,1925 U15.6 5119.92,1925 R23.2
Switch4_Up: U12.1 U12.4 U14.3 | length 959.5
  Top Layer w15: U12.4 3155,1575 3180,1550 3180,1515 3194.8,1500.2 U12.1 3295.2,1500.2 3415,1620 3415,2025 3470,2080 U14.3
Switch4_Up_A: P4.25 U14.11 | length 581.3
  Top Layer w15: U14.11 3900,1930 4205,2235 P4.25
Switch4_Up_B: P4.27 U14.10 | length 554.8
  Top Layer w15: U14.10 3940,1880 4205,2145 P4.27
Switch4_Up_C: P4.29 U14.9 | length 525.3
  Top Layer w15: U14.9 3975,1830 P4.29
Switch4_Up_INH: P4.31 R22.2 U14.6 | length 946
  Top Layer w15: R22.2 3465.63,1930 U14.6 3635,1930 3670,1895 3670,1810 3695,1785 4070,1785 4205,1920 P4.31
Switch_Down_CH0: J2.1 U8.13 U13.13 | length 2862.1
  Top Layer w10: J2.1 5519.06,3154.06 5525,3160
  Top Layer w15: v1(4510,2525) v1(4510,3440) 4565,3495 5390,3495 5525,3360 5525,3160
  Bottom Layer w15: v1(4510,3440) 4525,3455 4795,3455 U8.13 ; v1@4512.5,2527.5 v1(4510,2525) 4512.5,2522.5 4792.5,2522.5 U13.13
Switch_Down_CH1: J2.2 U8.14 U13.14 | length 3099.5
  Top Layer w10: J2.2 5536.09,3134.37 5536.4,3134.68
  Top Layer w15: v1(4450,2590) v1(4450,3490) 4480,3520 5405,3520 5545,3380 5545,3143.28 5536.4,3134.68
  Bottom Layer w15: v1(4450,2590) 4470,2570 4795,2570 U13.14 ; v1(4450,3490) 4470,3510 U8.14
Switch_Down_CH2: J2.3 U8.15 U13.15 | length 3349.5
  Top Layer w10: J2.3 5505.57,3114.69
  Top Layer w15: v1(4385,2670) v1(4385,3545) 5425,3545 5565,3405 5565,3135 5544.69,3114.68 5505.58,3114.68
  Bottom Layer w15: v1(4385,2670) 4390,2670 4420,2640 4710,2640 4735,2615 U13.15 ; v1(4385,3545) 4405,3565 4795,3565 U8.15
Switch_Down_CH3: J2.4 U8.12 U13.12 | length 2387
  Top Layer w10: v1(4690,3410) 5250,3410 5320,3340 5320,3170 5395,3095 J2.4
  Top Layer w15: v1(4590,2475) 4585,2475 4565,2495 4565,3375 4600,3410 v1(4690,3410)
  Bottom Layer w15: v1(4590,2475) 4600,2465 U13.12 ; v1(4690,3410) U8.12
Switch_Down_CH4: J2.5 U6.13 U15.13 | length 2344.5
  Top Layer w10: v1(4945,2965) 4945,3055 4987,3097 5143,3097 5185,3055 5185,2990 5330,2845 5455,2845 5575,2965 5575,3050 5549.68,3075.32 J2.5
  Top Layer w15: v1(4945,2055) v1(4945,2965)
  Bottom Layer w15: U15.13 4920,2025 4945,2050 v1(4945,2055) ; U6.13 4930,2990 4940,2980
Switch_Down_CH5: J2.6 U6.14 U15.14 | length 2006.4
  Top Layer w10: v1(4700,2980) 4700,3025 4790,3115 5290,3115 5349.37,3055.63 J2.6
  Top Layer w15: v1(4700,2090) v1(4700,2980)
  Bottom Layer w15: v1(4700,2090) 4715,2075 U15.14 ; 4700,2995 4700,3020 4720,3040 U6.14
Switch_Down_CH6: J2.7 U6.15 U15.15 | length 2240.5
  Top Layer w10: v1@4645,3015 v1(4645,3025) 4645,3085 4705,3145 v1(5285,3145) ; v1(5300,3050) 5314.05,3035.95 J2.7
  Top Layer w15: v1(4645,2180) v1@4645,3015
  Bottom Layer w10: v1(5285,3145) 5300,3130 v1(5300,3050)
  Bottom Layer w15: v1(4645,2180) 4645,2150 4670,2125 U15.15 ; v1@4650,3030 4650,3070 4670,3090 U6.15
Switch_Down_CH7: J2.8 U6.12 U15.12 | length 2804.4
  Top Layer w10: J2.8 5503.74,3016.26 v1(5530,2990)
  Top Layer w15: v1(4885,2915) v1(4885,1985) 4895,1975 v1(5455,1975)
  Bottom Layer w10: v1(5455,1975) 5530,2050 v1(5530,2990)
  Bottom Layer w15: U15.12 4875,1975 v1(4885,1985) ; U6.12 4880,2940 4890,2930
Switch_Up_CH0: J1.1 U5.13 U7.13 | length 775.2
  Top Layer w15: U5.13 3890,2990 3900,3000 v1(3900,3015) ; U7.13 v1(3905,3460)
  Bottom Layer w10: v1(3900,3015) 3900,2985 3956.26,2928.74 J1.1
  Bottom Layer w15: v1(3900,3015) 3900,3320 3930,3350 3930,3435 v1(3905,3460)
Switch_Up_CH1: J1.2 U5.14 U7.14 | length 1140.7
  Top Layer w15: v1(3705,3075) 3705,3050 3715,3040 U5.14 ; v1(3705,3480) 3735,3510 U7.14
  Bottom Layer w10: v1(3705,3075) 3705,2954.9 3750.84,2909.05 J1.2
  Bottom Layer w15: v1(3705,3075) v1(3705,3480)
Switch_Up_CH2: J1.3 U5.15 U7.15 | length 972.7
  Top Layer w15: U5.15 3925,3090 v1(3950,3115) ; U7.15 v1(3915,3560)
  Bottom Layer w10: v1(3950,3115) 3950,3105 4045,3010 4045,2900 4034.37,2889.37 J1.3
  Bottom Layer w15: v1(3915,3560) 3955,3520 3955,3120 v1(3950,3115)
Switch_Up_CH3: J1.4 U5.12 U7.12 | length 1025
  Top Layer w15: v1(3755,2965) 3780,2940 U5.12 3915,2940 3955,2980 4060,2980 4085,2955 v1(4085,2920) ; v1(3755,3395) 3770,3410 U7.12
  Bottom Layer w10: J1.4 4034.68,2869.68 4039.37,2874.37 4040.58,2874.37 4060,2893.79 4060,2895 v1(4085,2920)
  Bottom Layer w15: v1(3755,2965) v1(3755,3395)
Switch_Up_CH4: J1.5 U14.13 U16.13 | length 1111.3
  Top Layer w10: U16.13 3815,2520 v1(3835,2540)
  Top Layer w15: U14.13 3805,2030 v1(3840,2065)
  Bottom Layer w10: v1(3835,2540) 3800,2575 3800,2785 3865,2850 J1.5
  Bottom Layer w15: v1(3835,2540) 3835,2070 v1(3840,2065)
Switch_Up_CH5: J1.6 U14.14 U16.14 | length 1258
  Top Layer w15: v1@3640,2110 3640,2095 3655,2080 U14.14 ; v1(3640,2525) 3640,2650 3710,2720 v1(3830,2720) ; 3645,2565 3650,2570 U16.14
  Bottom Layer w10: v1(3830,2720) 3845,2720 3955.31,2830.31 J1.6
  Bottom Layer w15: v1(3640,2115) v1(3640,2525)
Switch_Up_CH6: J1.7 U14.15 U16.15 | length 967.2
  Top Layer w15: U14.15 3870,2130 v1@3935,2195 ; U16.15@3785,2620 v1@3870,2620
  Bottom Layer w10: v1(3875,2620) 3875,2725 3960,2810 3999.37,2810 J1.7
  Bottom Layer w15: v1(3875,2620) 3935,2560 v1@3935,2215
  other v1: 3935,2205
Switch_Up_CH7: J1.8 U14.12 U16.12 | length 1115.1
  Top Layer w15: v1@3690,1995 3705,1980 U14.12 ; v1@3690,2440 3690,2460 3700,2470 U16.12 3875,2470 3940,2535 v1(3940,2610)
  Bottom Layer w10: v1(3940,2610) 3940,2760 3970.94,2790.94 J1.8
  Bottom Layer w15: v1(3690,2005) v1(3690,2430)
VDD_3V3: C7.1 C8.1 C9.2 C10.2 C11.1 C12.1 C13.2 C14.2 C21.1 C22.1 C23.1 C24.2 C25.2 C26.2 C27.1 C28.2 P3.1 P3.2 U5.16 U6.16 U7.16 U8.16 U13.16 U14.16 U15.16 U16.16 | length 11965.6
  Top Layer w15: U14.16 3780,2180 3840,2240 4105,2240 4177.97,2312.97 4247.97,2312.97 4255,2320 4255,2720 ; U16.16 3777.5,2667.5 4012.5,2667.5 4055,2710 4245,2710 4255,2720 ; U5.16 3855,3140 3875,3160 4085,3160 4135,3110 4250,3110 4255,3115 ; v1@4255,3525 4255,3115 ; 4255,2720 4255,3115
  Top Layer w30: C27.1@2547.13,2730 C27.1@2562.13,2715 ; P3.2 P3.1 2541.82,1503.18 C26.2 2537.77,1564.06 C22.1 C23.1 2537.77,2267.77 2567.13,2297.13 C21.1 2562.13,2595 C27.1@2562.13,2715 ; U7.16 4195,3610 4255,3670 ; v1(4255,3535) v1(4255,3560) 4255,3670 ; C27.1@2562.13,2715 2562.13,2847.13 2616.81,2901.81 C10.2 2587.76,3044.06 C8.1 2587.76,3511.57 C13.2 2637.76,3568.43 C11.1 C12.1 2637.76,4112.76 2805,4280 4110,4280 4255,4135 4255,3670
  Bottom Layer w15: U15.16 4745,2230 4460,2230 4380,2310 4265,2310 4257.97,2317.03 4257.97,2707.03 4255,2710 ; U13.16 4720,2665 4675,2710 4255,2710 ; U6.16 4565,3140 4535,3110 4255,3110 ; U8.16 4290,3610 4255,3575 v1(4255,3560) v1(4255,3535) 4255,3110 ; 4255,2710 4255,3110
VDD_5V: C1.1 C2.2 C3.1 C4.2 C5.2 C6.2 C15.1 C16.2 C17.1 C18.2 C19.2 C20.2 P1.1 P1.2 R2.2 R3.2 R5.2 R6.2 R14.2 R15.2 R17.2 R18.2 U1.14 U2.14 U3.5 U4.5 U9.14 U10.5 U11.14 U12.5 | length 6657.5
  Top Layer w10: U10.5 3234.8,2145 3345,2145 3370,2120 3370,1990 3353.39,1973.39 U11.14 ; U3.5 3192.4,2842.6 3260,2775 3380,2775 3430,2725 3430,2695 3383.39,2648.39 U9.14 ; P1.1 3480,4205 3635,4050 3635,3930 3615,3910 3500,3910 3486.61,3923.39 U2.14 ; U4.5 3227.4,3482.6 3315,3395 3385,3395 3420,3360 3420,3295 3413.39,3288.39 U1.14
  Top Layer w30: R5.2@2860,3860 2861.26,3861.26 R6.2 2861.26,3951.26 3090,4180 P1.2 P1.1 ; R5.2 2940,3776.26 C4.2 C6.2 2965,3635 C3.1 ; U12.5 2897.39,1500.2 C17.1 2862.58,1597.42 2828.53,1631.47 C20.2 C18.2 2828.53,1811.26 R17.2 R18.2 2749.79,2089.79 2870,2210 C15.1 ; U10.5 3022.4,2202.6 C15.1 ; U3.5 2991.89,2842.6 C1.1 ; U4.5 3052.4,3482.6 2985,3550 C3.1 ; C15.1 2870,2546.26 R14.2 2776.26,2781.26 2810,2815 2885,2815 2929.49,2859.49 C1.1 ; C1.1 2929.49,2955.51 2893.74,2991.26 C2.2 2893.74,3141.89 R2.2 R3.2 2815.63,3350.63 2965,3500 C3.1
pads on no net: J1.9 J1.10 J2.9 J2.10 U1.5 U1.6 U1.7 U1.9 U1.10 U1.11 U1.12 U1.15 U2.5 U2.6 U2.7 U2.9 U2.10 U2.11 U2.12 U2.15 U5.1 U5.2 U5.4 U5.5 U6.1 U6.2 U6.4 U6.5 U7.1 U7.2 U7.4 U7.5 U8.1 U8.2 U8.4 U8.5 U9.5 U9.6 U9.7 U9.9 U9.10 U9.11 U9.12 U9.15 U11.5 U11.6 U11.7 U11.9 U11.10 U11.11 U11.12 U11.15 U13.1 U13.2 U13.4 U13.5 U14.1 U14.2 U14.4 U14.5 U15.1 U15.2 U15.4 U15.5 U16.1 U16.2 U16.4 U16.5

## Silkscreen, mask and mechanical layers (free items; w line width, h text height)
Mechanical 13:
  lines w10: 2435,1330 2435,4330 5610,4330 5610,4305 5610,1330 2435,1330

## Text inside footprints (layer, text, board x,y; h text height)
P2: Top Overlay "2" at 3480,3940 h35; Top Overlay "1" at 3480,3840 h35; Top Overlay "1" at 4160,3840 h35; Top Overlay "1" at 4200,3840 h35; Top Overlay "12" at 4160,3940 h35
P4: Top Overlay "2" at 4285,3560 h35 r270; Top Overlay "1" at 4185,3560 h35 r270; Top Overlay "31" at 4185,1900 h35 r270; Top Overlay "32" at 4285,1900 h35 r270